# EAGLE board headstage-64-coax-adapter (EAGLE 9.5.1)
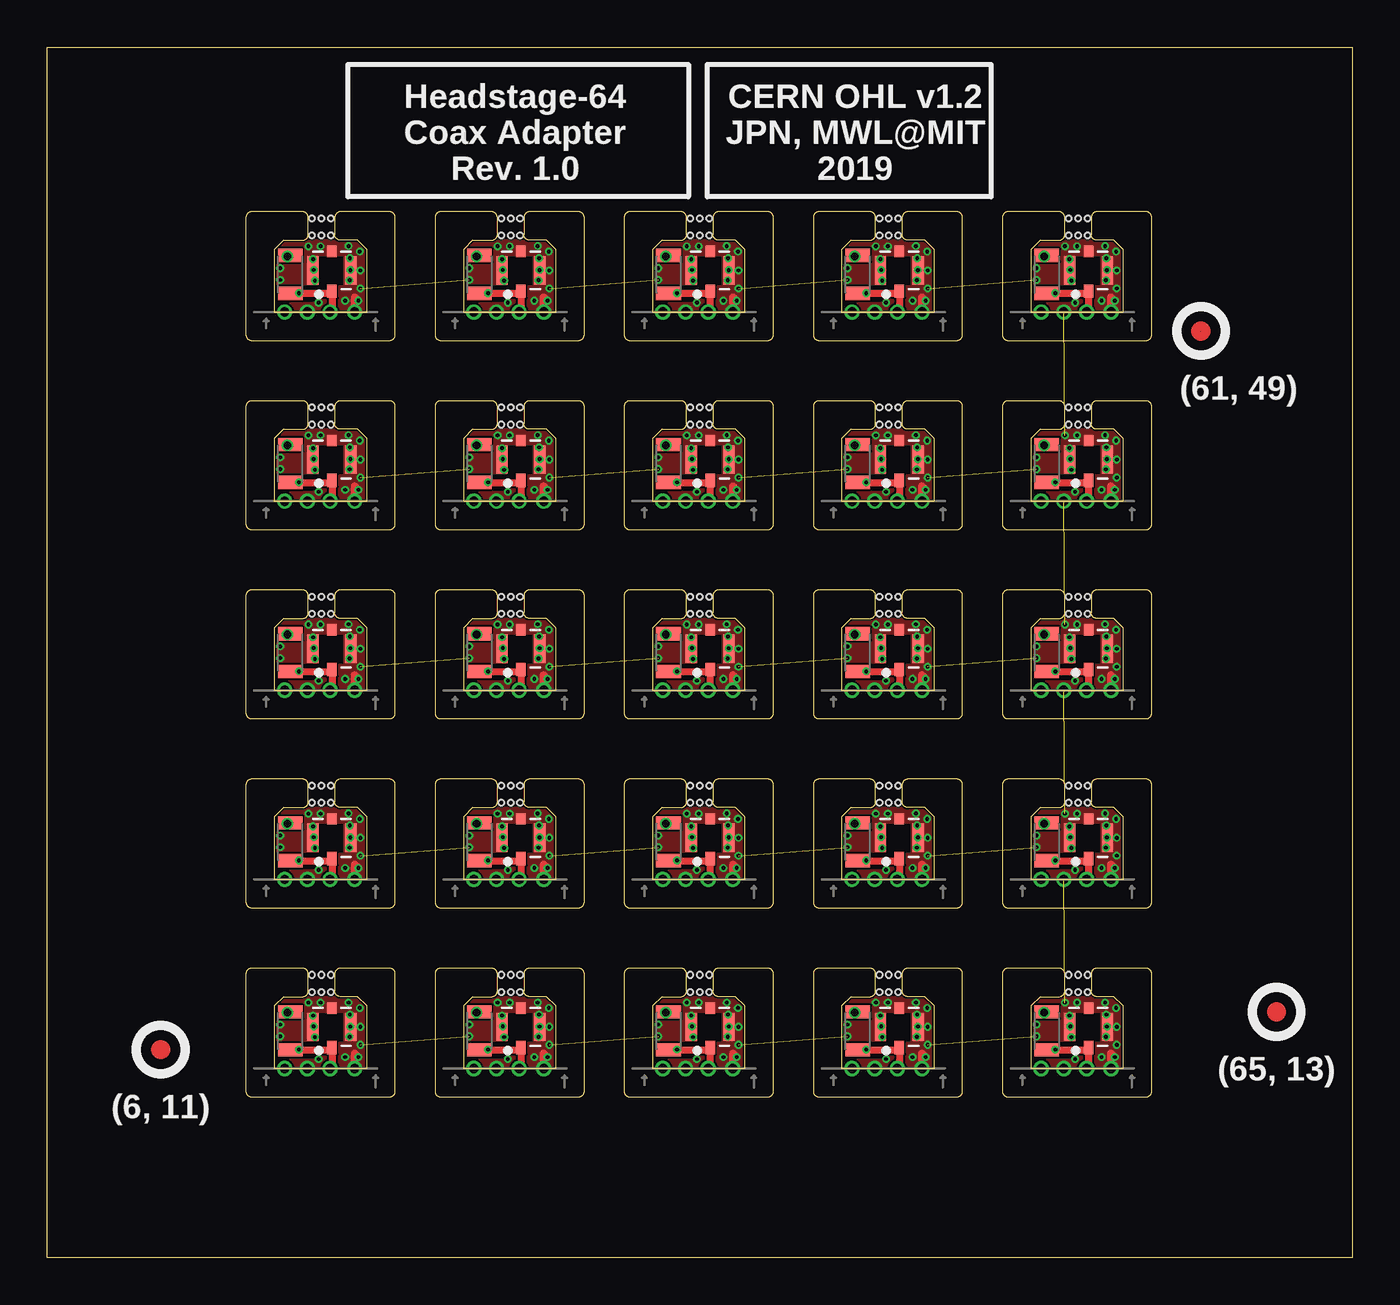
[diagram p0: board, top side]
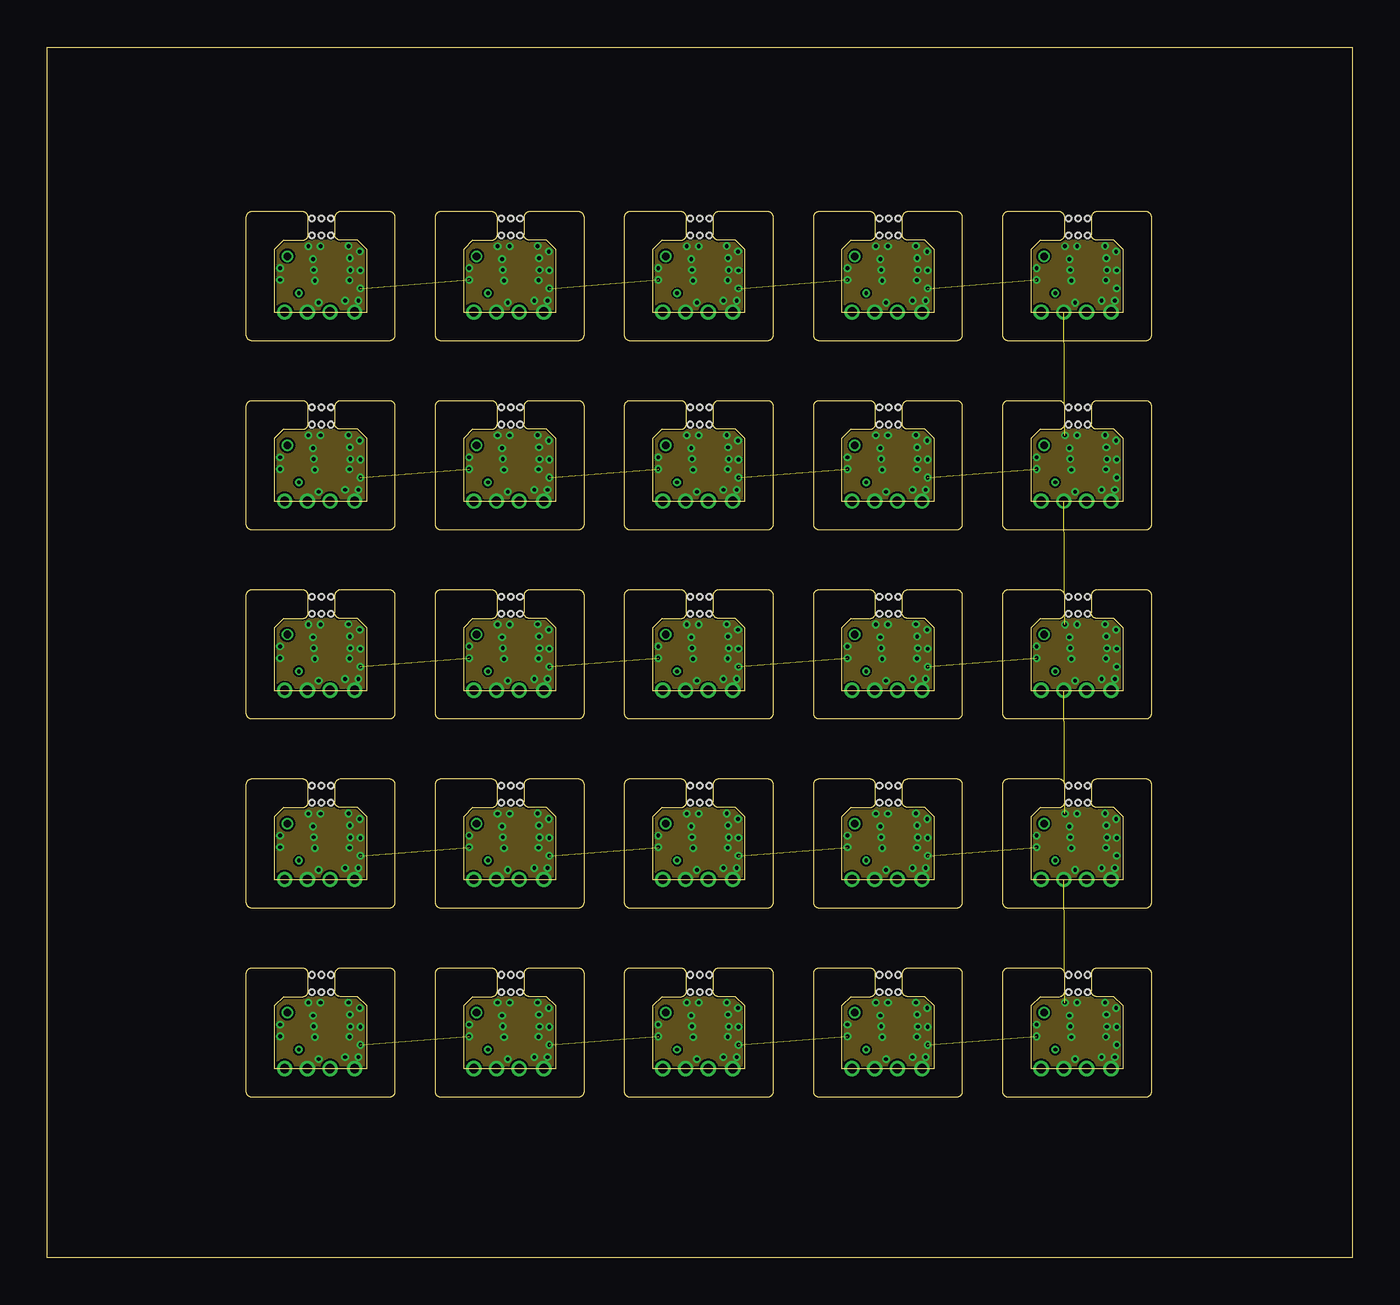
[diagram p1: board, inner layer Route2]
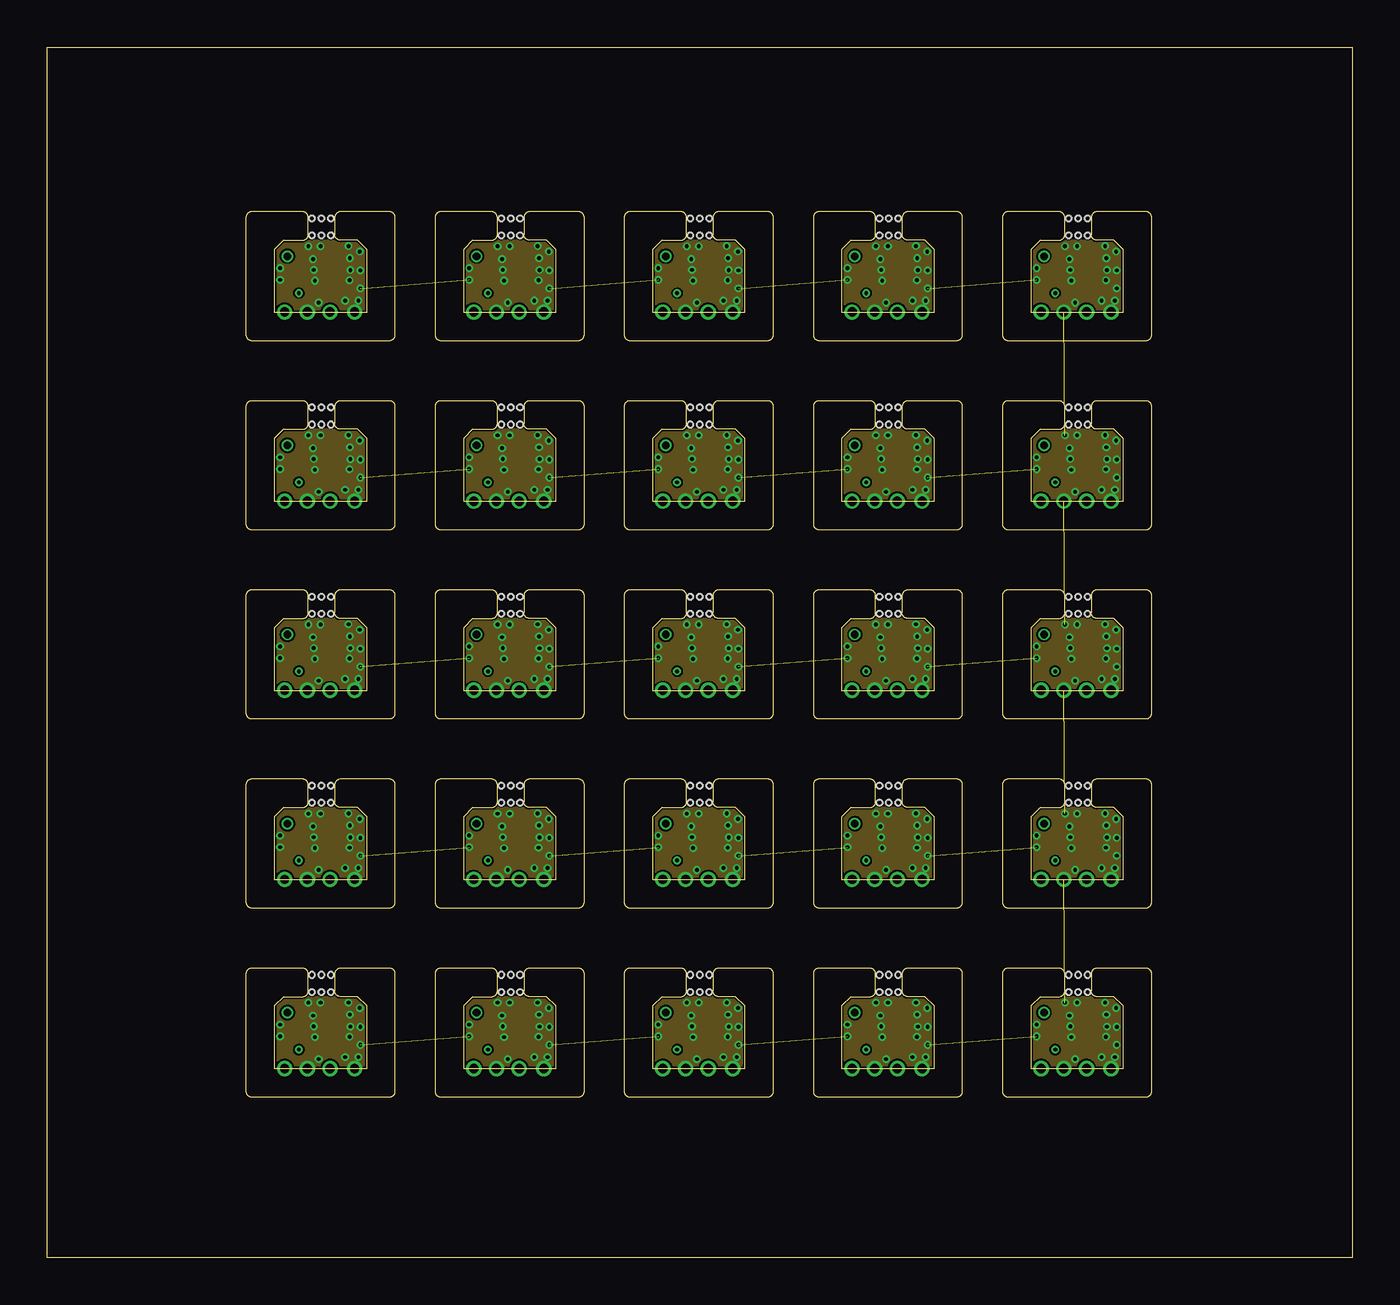
[diagram p2: board, inner layer Route15]
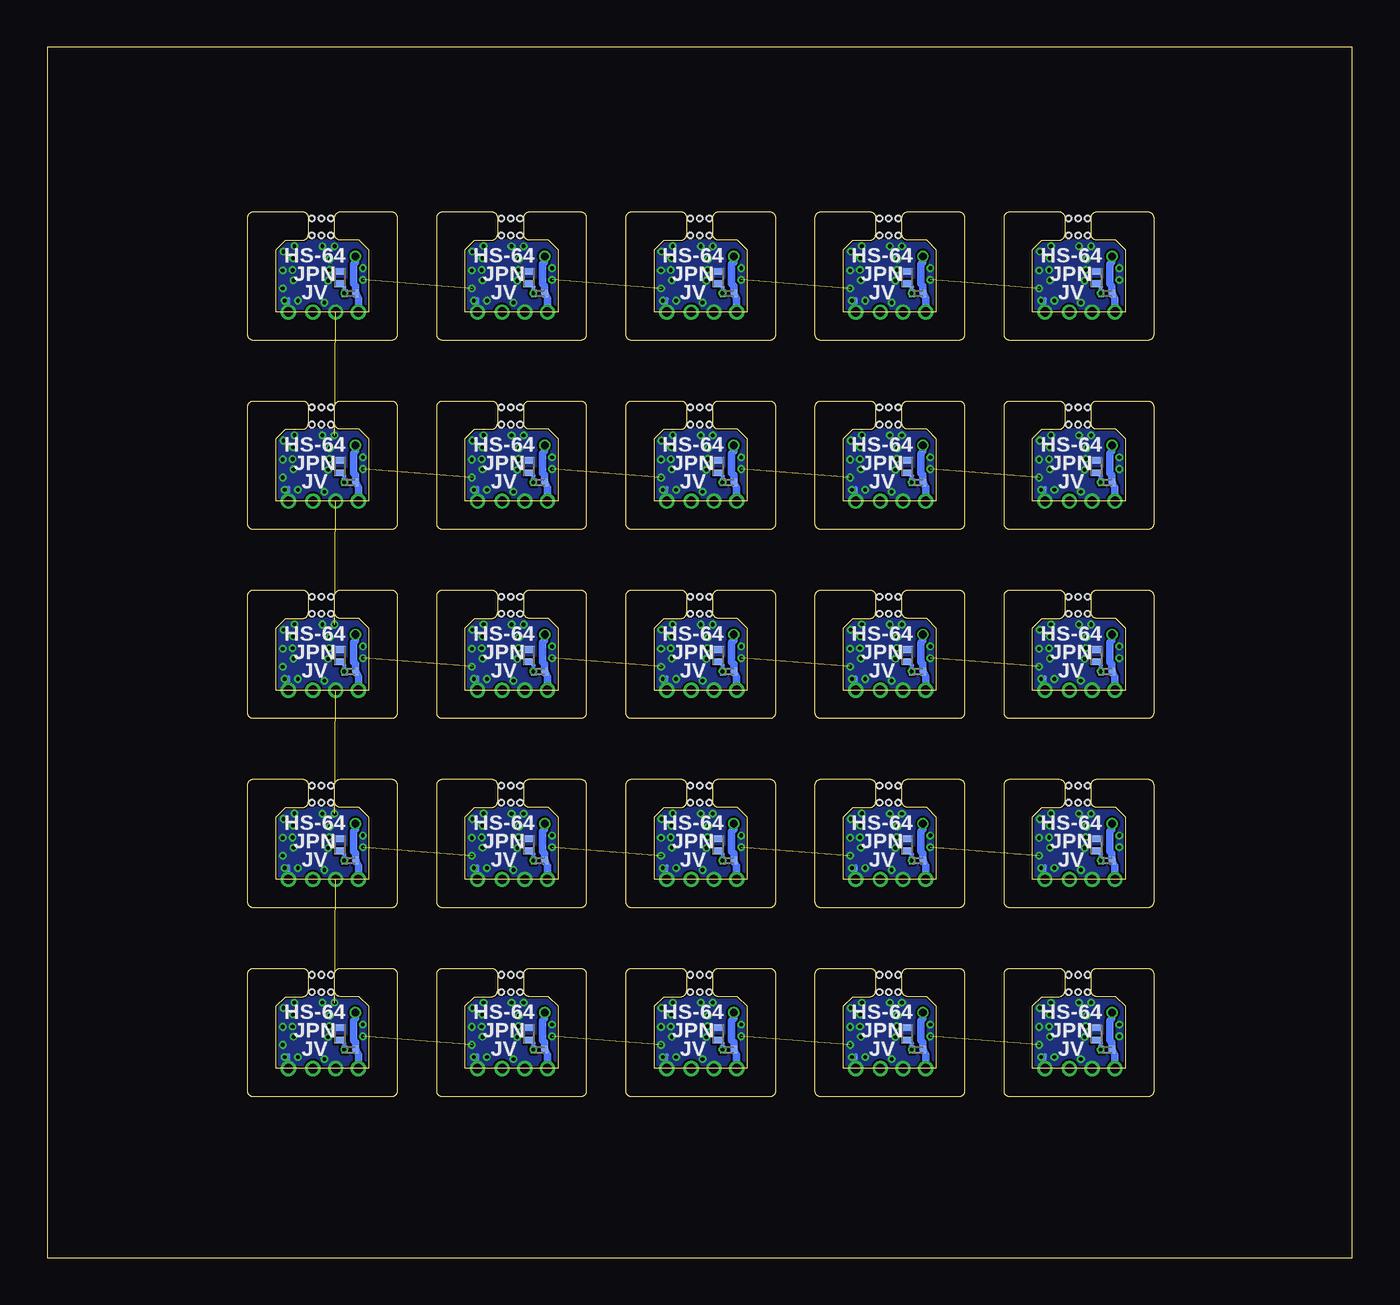
[diagram p3: board, bottom side, seen from below]

Size 69 x 64 mm. Coordinates in mm from the lower left corner, seen from the top.
Outline: 554 segments
Copper layers (1*2*15*16): Top 0.035mm / dielectric 0.2mm / Route2 0.0175mm / dielectric 0.3mm / Route15 0.0175mm / dielectric 0.2mm / Bottom 0.035mm
Design rules "seeed-studio-4-layer *": minimum track width 4mil, minimum drill 0.2mm, track to track 4mil, track to pad 4mil, pad to pad 4mil, via to via 4mil, smd to smd 0mil, copper to edge 0.1mm, drill to drill 10mil, minimum pad ring 6mil, minimum via ring 4mil, stop-mask expansion 4mil, vias tented up to drill 100mil, thermal gap 10mil
Holes 0.3 mm at 14.5,14.95 14.5,14.05 15,14.05 14,14.05 15,14.95 14,14.95 24.5,14.95 24.5,14.05 25,14.05 24,14.05 25,14.95 24,14.95 34.5,14.95 34.5,14.05 35,14.05 34,14.05 35,14.95 34,14.95 44.5,14.95 44.5,14.05 45,14.05 44,14.05 45,14.95 44,14.95 54.5,14.95 54.5,14.05 55,14.05 54,14.05 55,14.95 54,14.95 14.5,24.95 14.5,24.05 15,24.05 14,24.05 15,24.95 14,24.95 24.5,24.95 24.5,24.05 25,24.05 24,24.05 25,24.95 24,24.95 34.5,24.95 34.5,24.05 35,24.05 34,24.05 35,24.95 34,24.95 44.5,24.95 44.5,24.05 45,24.05 44,24.05 45,24.95 44,24.95 54.5,24.95 54.5,24.05 55,24.05 54,24.05 55,24.95 54,24.95 14.5,34.95 14.5,34.05 15,34.05 14,34.05 15,34.95 14,34.95 24.5,34.95 24.5,34.05 25,34.05 24,34.05 25,34.95 24,34.95 34.5,34.95 34.5,34.05 35,34.05 34,34.05 35,34.95 34,34.95 44.5,34.95 44.5,34.05 45,34.05 44,34.05 45,34.95 44,34.95 54.5,34.95 54.5,34.05 55,34.05 54,34.05 55,34.95 54,34.95 14.5,44.95 14.5,44.05 15,44.05 14,44.05 15,44.95 14,44.95 24.5,44.95 24.5,44.05 25,44.05 24,44.05 25,44.95 24,44.95 34.5,44.95 34.5,44.05 35,44.05 34,44.05 35,44.95 34,44.95 44.5,44.95 44.5,44.05 45,44.05 44,44.05 45,44.95 44,44.95 54.5,44.95 54.5,44.05 55,44.05 54,44.05 55,44.95 54,44.95 14.5,54.95 14.5,54.05 15,54.05 14,54.05 15,54.95 14,54.95 24.5,54.95 24.5,54.05 25,54.05 24,54.05 25,54.95 24,54.95 34.5,54.95 34.5,54.05 35,54.05 34,54.05 35,54.95 34,54.95 44.5,54.95 44.5,54.05 45,54.05 44,54.05 45,54.95 44,54.95 54.5,54.95 54.5,54.05 55,54.05 54,54.05 55,54.95 54,54.95

## Footprints (pad centres in the part's own frame; a part is rotated, then mirrored left to right if it is on the bottom)
0402T-DFN = smd 0.35 x 0.6: A -0.325,0; C 0.325,0
X_FL_R_SMT_1(02) = smd 0.5 x 0.7: P$1 0,-1.1 | smd 0.6 x 1.5: P$2 -1,0; P$4 1,0 | smd 0.5 x 0.6: P$3 0,1
HEADSTAGE64-DAUGHER-CARD-CASTELLATED = drill 0.5: 1 -2.4,0; 2 -1.2,0; 3 0,0; 4 1.3,0
0805T = smd 0.7 x 1.3: 1 -1,0; 2 1,0
0201T = smd 0.3 x 0.4: 1 -0.3,0; 2 0.3,0

## Placement (x,y rotation side)
D1  SESD0402X1UN-0020-090  [0402T-DFN]  13.53,11.83 270 bottom
D3  SESD0402X1UN-0020-090  [0402T-DFN]  23.53,11.83 270 bottom
D4  SESD0402X1UN-0020-090  [0402T-DFN]  13.53,21.83 270 bottom
D5  SESD0402X1UN-0020-090  [0402T-DFN]  33.53,11.83 270 bottom
D6  SESD0402X1UN-0020-090  [0402T-DFN]  33.53,21.83 270 bottom
D7  SESD0402X1UN-0020-090  [0402T-DFN]  43.53,11.83 270 bottom
D8  SESD0402X1UN-0020-090  [0402T-DFN]  23.53,21.83 270 bottom
D9  SESD0402X1UN-0020-090  [0402T-DFN]  53.53,11.83 270 bottom
D11  SESD0402X1UN-0020-090  [0402T-DFN]  43.53,21.83 270 bottom
D13  SESD0402X1UN-0020-090  [0402T-DFN]  53.53,21.83 270 bottom
D15  SESD0402X1UN-0020-090  [0402T-DFN]  13.53,31.83 270 bottom
D17  SESD0402X1UN-0020-090  [0402T-DFN]  23.53,31.83 270 bottom
D19  SESD0402X1UN-0020-090  [0402T-DFN]  33.53,31.83 270 bottom
D21  SESD0402X1UN-0020-090  [0402T-DFN]  43.53,31.83 270 bottom
D23  SESD0402X1UN-0020-090  [0402T-DFN]  53.53,31.83 270 bottom
D25  SESD0402X1UN-0020-090  [0402T-DFN]  13.53,41.83 270 bottom
D27  SESD0402X1UN-0020-090  [0402T-DFN]  23.53,41.83 270 bottom
D29  SESD0402X1UN-0020-090  [0402T-DFN]  33.53,41.83 270 bottom
D31  SESD0402X1UN-0020-090  [0402T-DFN]  43.53,41.83 270 bottom
D33  SESD0402X1UN-0020-090  [0402T-DFN]  53.53,41.83 270 bottom
D35  SESD0402X1UN-0020-090  [0402T-DFN]  13.53,51.83 270 bottom
D37  SESD0402X1UN-0020-090  [0402T-DFN]  23.53,51.83 270 bottom
D39  SESD0402X1UN-0020-090  [0402T-DFN]  33.53,51.83 270 bottom
D41  SESD0402X1UN-0020-090  [0402T-DFN]  43.53,51.83 270 bottom
D43  SESD0402X1UN-0020-090  [0402T-DFN]  53.53,51.83 270 bottom
E$1  [FIDUCIAL]  65,13 0 top
E$2  [FIDUCIAL]  61,49 0 top
E$4  [FIDUCIAL]  6,11 0 top
J1  X.FL-R-SMT-1(02)  [X_FL_R_SMT_1(02)]  15.05,12.2 0 top
J2  [HEADSTAGE64-DAUGHER-CARD-CASTELLATED]  14.95,10 0 top
J5  X.FL-R-SMT-1(02)  [X_FL_R_SMT_1(02)]  25.05,12.2 0 top
J6  [HEADSTAGE64-DAUGHER-CARD-CASTELLATED]  24.95,10 0 top
J7  X.FL-R-SMT-1(02)  [X_FL_R_SMT_1(02)]  15.05,22.2 0 top
J8  [HEADSTAGE64-DAUGHER-CARD-CASTELLATED]  14.95,20 0 top
J9  X.FL-R-SMT-1(02)  [X_FL_R_SMT_1(02)]  35.05,12.2 0 top
J10  [HEADSTAGE64-DAUGHER-CARD-CASTELLATED]  34.95,10 0 top
J11  X.FL-R-SMT-1(02)  [X_FL_R_SMT_1(02)]  35.05,22.2 0 top
J12  [HEADSTAGE64-DAUGHER-CARD-CASTELLATED]  34.95,20 0 top
J13  X.FL-R-SMT-1(02)  [X_FL_R_SMT_1(02)]  45.05,12.2 0 top
J14  [HEADSTAGE64-DAUGHER-CARD-CASTELLATED]  44.95,10 0 top
J15  X.FL-R-SMT-1(02)  [X_FL_R_SMT_1(02)]  25.05,22.2 0 top
J16  [HEADSTAGE64-DAUGHER-CARD-CASTELLATED]  24.95,20 0 top
J17  X.FL-R-SMT-1(02)  [X_FL_R_SMT_1(02)]  55.05,12.2 0 top
J18  [HEADSTAGE64-DAUGHER-CARD-CASTELLATED]  54.95,10 0 top
J21  X.FL-R-SMT-1(02)  [X_FL_R_SMT_1(02)]  45.05,22.2 0 top
J22  [HEADSTAGE64-DAUGHER-CARD-CASTELLATED]  44.95,20 0 top
J25  X.FL-R-SMT-1(02)  [X_FL_R_SMT_1(02)]  55.05,22.2 0 top
J26  [HEADSTAGE64-DAUGHER-CARD-CASTELLATED]  54.95,20 0 top
J29  X.FL-R-SMT-1(02)  [X_FL_R_SMT_1(02)]  15.05,32.2 0 top
J30  [HEADSTAGE64-DAUGHER-CARD-CASTELLATED]  14.95,30 0 top
J33  X.FL-R-SMT-1(02)  [X_FL_R_SMT_1(02)]  25.05,32.2 0 top
J34  [HEADSTAGE64-DAUGHER-CARD-CASTELLATED]  24.95,30 0 top
J37  X.FL-R-SMT-1(02)  [X_FL_R_SMT_1(02)]  35.05,32.2 0 top
J38  [HEADSTAGE64-DAUGHER-CARD-CASTELLATED]  34.95,30 0 top
J41  X.FL-R-SMT-1(02)  [X_FL_R_SMT_1(02)]  45.05,32.2 0 top
J42  [HEADSTAGE64-DAUGHER-CARD-CASTELLATED]  44.95,30 0 top
J45  X.FL-R-SMT-1(02)  [X_FL_R_SMT_1(02)]  55.05,32.2 0 top
J46  [HEADSTAGE64-DAUGHER-CARD-CASTELLATED]  54.95,30 0 top
J49  X.FL-R-SMT-1(02)  [X_FL_R_SMT_1(02)]  15.05,42.2 0 top
J50  [HEADSTAGE64-DAUGHER-CARD-CASTELLATED]  14.95,40 0 top
J53  X.FL-R-SMT-1(02)  [X_FL_R_SMT_1(02)]  25.05,42.2 0 top
J54  [HEADSTAGE64-DAUGHER-CARD-CASTELLATED]  24.95,40 0 top
J57  X.FL-R-SMT-1(02)  [X_FL_R_SMT_1(02)]  35.05,42.2 0 top
J58  [HEADSTAGE64-DAUGHER-CARD-CASTELLATED]  34.95,40 0 top
J61  X.FL-R-SMT-1(02)  [X_FL_R_SMT_1(02)]  45.05,42.2 0 top
J62  [HEADSTAGE64-DAUGHER-CARD-CASTELLATED]  44.95,40 0 top
J65  X.FL-R-SMT-1(02)  [X_FL_R_SMT_1(02)]  55.05,42.2 0 top
J66  [HEADSTAGE64-DAUGHER-CARD-CASTELLATED]  54.95,40 0 top
J69  X.FL-R-SMT-1(02)  [X_FL_R_SMT_1(02)]  15.05,52.2 0 top
J70  [HEADSTAGE64-DAUGHER-CARD-CASTELLATED]  14.95,50 0 top
J73  X.FL-R-SMT-1(02)  [X_FL_R_SMT_1(02)]  25.05,52.2 0 top
J74  [HEADSTAGE64-DAUGHER-CARD-CASTELLATED]  24.95,50 0 top
J77  X.FL-R-SMT-1(02)  [X_FL_R_SMT_1(02)]  35.05,52.2 0 top
J78  [HEADSTAGE64-DAUGHER-CARD-CASTELLATED]  34.95,50 0 top
J81  X.FL-R-SMT-1(02)  [X_FL_R_SMT_1(02)]  45.05,52.2 0 top
J82  [HEADSTAGE64-DAUGHER-CARD-CASTELLATED]  44.95,50 0 top
J85  X.FL-R-SMT-1(02)  [X_FL_R_SMT_1(02)]  55.05,52.2 0 top
J86  [HEADSTAGE64-DAUGHER-CARD-CASTELLATED]  54.95,50 0 top
L1  CIG21L4R7MNE  [0805T]  12.85,11.99 90 top
L3  CIG21L4R7MNE  [0805T]  22.85,11.99 90 top
L4  CIG21L4R7MNE  [0805T]  12.85,21.99 90 top
L5  CIG21L4R7MNE  [0805T]  32.85,11.99 90 top
L6  CIG21L4R7MNE  [0805T]  32.85,21.99 90 top
L7  CIG21L4R7MNE  [0805T]  42.85,11.99 90 top
L8  CIG21L4R7MNE  [0805T]  22.85,21.99 90 top
L9  CIG21L4R7MNE  [0805T]  52.85,11.99 90 top
L11  CIG21L4R7MNE  [0805T]  42.85,21.99 90 top
L13  CIG21L4R7MNE  [0805T]  52.85,21.99 90 top
L15  CIG21L4R7MNE  [0805T]  12.85,31.99 90 top
L17  CIG21L4R7MNE  [0805T]  22.85,31.99 90 top
L19  CIG21L4R7MNE  [0805T]  32.85,31.99 90 top
L21  CIG21L4R7MNE  [0805T]  42.85,31.99 90 top
L23  CIG21L4R7MNE  [0805T]  52.85,31.99 90 top
L25  CIG21L4R7MNE  [0805T]  12.85,41.99 90 top
L27  CIG21L4R7MNE  [0805T]  22.85,41.99 90 top
L29  CIG21L4R7MNE  [0805T]  32.85,41.99 90 top
L31  CIG21L4R7MNE  [0805T]  42.85,41.99 90 top
L33  CIG21L4R7MNE  [0805T]  52.85,41.99 90 top
L35  CIG21L4R7MNE  [0805T]  12.85,51.99 90 top
L37  CIG21L4R7MNE  [0805T]  22.85,51.99 90 top
L39  CIG21L4R7MNE  [0805T]  32.85,51.99 90 top
L41  CIG21L4R7MNE  [0805T]  42.85,51.99 90 top
L43  CIG21L4R7MNE  [0805T]  52.85,51.99 90 top
R2  1k  [0201T]  22.98,10.99 0 bottom
R3  1k  [0201T]  12.98,10.99 0 bottom
R4  1k  [0201T]  12.98,20.99 0 bottom
R5  1k  [0201T]  32.98,10.99 0 bottom
R6  1k  [0201T]  32.98,20.99 0 bottom
R7  1k  [0201T]  42.98,10.99 0 bottom
R8  1k  [0201T]  22.98,20.99 0 bottom
R9  1k  [0201T]  52.98,10.99 0 bottom
R11  1k  [0201T]  42.98,20.99 0 bottom
R13  1k  [0201T]  52.98,20.99 0 bottom
R15  1k  [0201T]  12.98,30.99 0 bottom
R17  1k  [0201T]  22.98,30.99 0 bottom
R19  1k  [0201T]  32.98,30.99 0 bottom
R21  1k  [0201T]  42.98,30.99 0 bottom
R23  1k  [0201T]  52.98,30.99 0 bottom
R25  1k  [0201T]  12.98,40.99 0 bottom
R27  1k  [0201T]  22.98,40.99 0 bottom
R29  1k  [0201T]  32.98,40.99 0 bottom
R31  1k  [0201T]  42.98,40.99 0 bottom
R33  1k  [0201T]  52.98,40.99 0 bottom
R35  1k  [0201T]  12.98,50.99 0 bottom
R37  1k  [0201T]  22.98,50.99 0 bottom
R39  1k  [0201T]  32.98,50.99 0 bottom
R41  1k  [0201T]  42.98,50.99 0 bottom
R43  1k  [0201T]  52.98,50.99 0 bottom

## Library data of the parts
D1 D3-D9 D11 D13 D15 D17 D19 D21 D23 D25 D27 D29 D31 D33 D35 D37 D39 D41 D43 J1 J2 J5-J18 J21 J22 J25 J26 J29 J30 J33 J34 J37 J38 J41 J42 J45 J46 J49 J50 J53 J54 J57 J58 J61 J62 J65 J66 J69 J70 J73 J74 J77 J78 J81 J82 J85 J86 L1 L3-L9 L11 L13 L15 L17 L19 L21 L23 L25 L27 L29 L31 L33 L35 L37 L39 L41 L43 R2-R9 R11 R13 R15 R17 R19 R21 R23 R25 R27 R29 R31 R33 R35 R37 R39 R41 R43 = jonnew
E$1 E$2 E$4 = fiducial

## Nets
_SIGOUT1: D1.C J1.P$1 J2.3 L1.1 R3.1
_SIGOUT3: D3.C J5.P$1 J6.3 L3.1 R2.1
_SIGOUT4: D4.C J7.P$1 J8.3 L4.1 R4.1
_SIGOUT5: D5.C J9.P$1 J10.3 L5.1 R5.1
_SIGOUT6: D6.C J11.P$1 J12.3 L6.1 R6.1
_SIGOUT7: D7.C J13.P$1 J14.3 L7.1 R7.1
_SIGOUT8: D8.C J15.P$1 J16.3 L8.1 R8.1
_SIGOUT9: D9.C J17.P$1 J18.3 L9.1 R9.1
_SIGOUT11: D11.C J21.P$1 J22.3 L11.1 R11.1
_SIGOUT13: D13.C J25.P$1 J26.3 L13.1 R13.1
_SIGOUT15: D15.C J29.P$1 J30.3 L15.1 R15.1
_SIGOUT17: D17.C J33.P$1 J34.3 L17.1 R17.1
_SIGOUT19: D19.C J37.P$1 J38.3 L19.1 R19.1
_SIGOUT21: D21.C J41.P$1 J42.3 L21.1 R21.1
_SIGOUT23: D23.C J45.P$1 J46.3 L23.1 R23.1
_SIGOUT25: D25.C J49.P$1 J50.3 L25.1 R25.1
_SIGOUT27: D27.C J53.P$1 J54.3 L27.1 R27.1
_SIGOUT29: D29.C J57.P$1 J58.3 L29.1 R29.1
_SIGOUT31: D31.C J61.P$1 J62.3 L31.1 R31.1
_SIGOUT33: D33.C J65.P$1 J66.3 L33.1 R33.1
_SIGOUT35: D35.C J69.P$1 J70.3 L35.1 R35.1
_SIGOUT37: D37.C J73.P$1 J74.3 L37.1 R37.1
_SIGOUT39: D39.C J77.P$1 J78.3 L39.1 R39.1
_SIGOUT41: D41.C J81.P$1 J82.3 L41.1 R41.1
_SIGOUT43: D43.C J85.P$1 J86.3 L43.1 R43.1
GND: D1.A D3.A D4.A D5.A D6.A D7.A D8.A D9.A D11.A D13.A D15.A D17.A D19.A D21.A D23.A D25.A D27.A D29.A D31.A D33.A D35.A D37.A D39.A D41.A D43.A J1.P$2 J1.P$3 J1.P$4 J2.2 J2.4 J5.P$2 J5.P$3 J5.P$4 J6.2 J6.4 J7.P$2 J7.P$3 J7.P$4 J8.2 J8.4 J9.P$2 J9.P$3 J9.P$4 J10.2 J10.4 J11.P$2 J11.P$3 J11.P$4 J12.2 J12.4 J13.P$2 J13.P$3 J13.P$4 J14.2 J14.4 J15.P$2 J15.P$3 J15.P$4 J16.2 J16.4 J17.P$2 J17.P$3 J17.P$4 J18.2 J18.4 J21.P$2 J21.P$3 J21.P$4 J22.2 J22.4 J25.P$2 J25.P$3 J25.P$4 J26.2 J26.4 J29.P$2 J29.P$3 J29.P$4 J30.2 J30.4 J33.P$2 J33.P$3 J33.P$4 J34.2 J34.4 J37.P$2 J37.P$3 J37.P$4 J38.2 J38.4 J41.P$2 J41.P$3 J41.P$4 J42.2 J42.4 J45.P$2 J45.P$3 J45.P$4 J46.2 J46.4 J49.P$2 J49.P$3 J49.P$4 J50.2 J50.4 J53.P$2 J53.P$3 J53.P$4 J54.2 J54.4 J57.P$2 J57.P$3 J57.P$4 J58.2 J58.4 J61.P$2 J61.P$3 J61.P$4 J62.2 J62.4 J65.P$2 J65.P$3 J65.P$4 J66.2 J66.4 J69.P$2 J69.P$3 J69.P$4 J70.2 J70.4 J73.P$2 J73.P$3 J73.P$4 J74.2 J74.4 J77.P$2 J77.P$3 J77.P$4 J78.2 J78.4 J81.P$2 J81.P$3 J81.P$4 J82.2 J82.4 J85.P$2 J85.P$3 J85.P$4 J86.2 J86.4
N$3: J6.1 L3.2 R2.2
N$5: J8.1 L4.2 R4.2
N$7: J10.1 L5.2 R5.2
N$9: J12.1 L6.2 R6.2
N$11: J14.1 L7.2 R7.2
N$13: J16.1 L8.2 R8.2
N$15: J18.1 L9.2 R9.2
N$19: J22.1 L11.2 R11.2
N$23: J26.1 L13.2 R13.2
N$27: J30.1 L15.2 R15.2
N$31: J34.1 L17.2 R17.2
N$35: J38.1 L19.2 R19.2
N$39: J42.1 L21.2 R21.2
N$43: J46.1 L23.2 R23.2
N$47: J50.1 L25.2 R25.2
N$48: J2.1 L1.2 R3.2
N$53: J54.1 L27.2 R27.2
N$57: J58.1 L29.2 R29.2
N$61: J62.1 L31.2 R31.2
N$65: J66.1 L33.2 R33.2
N$69: J70.1 L35.2 R35.2
N$73: J74.1 L37.2 R37.2
N$77: J78.1 L39.2 R39.2
N$81: J82.1 L41.2 R41.2
N$85: J86.1 L43.2 R43.2

## Tracks (layer width: path | path; a pad name or v marks a point on that pad's centre or on a via)
_SIGOUT1  (via drill 0.2)
  Top 0.2: v13.3,11 13.2,10.99
  Top 0.37: 13.2,10.99 14.94,10.99 | J1.P$1 15.05,10.1 arc-90 J2.3
  Top 0.4: 14.95,11 J1.P$1 14.94,10.99 | L1.1 v13.3,11
  Bottom 0.127: R3.1 R3.1 arc90 v13.3,11
  Bottom 0.2: R3.1 13.28,11.34 D1.C
_SIGOUT3  (via drill 0.2)
  Top 0.2: v23.3,11 23.2,10.99
  Top 0.37: 23.2,10.99 24.94,10.99 | J5.P$1 25.05,10.1 arc-90 J6.3
  Top 0.4: 24.95,11 J5.P$1 24.94,10.99 | L3.1 v23.3,11
  Bottom 0.127: R2.1 R2.1 arc90 v23.3,11
  Bottom 0.2: R2.1 23.28,11.34 D3.C
_SIGOUT4  (via drill 0.2)
  Top 0.2: v13.3,21 13.2,20.99
  Top 0.37: 13.2,20.99 14.94,20.99 | J7.P$1 15.05,20.1 arc-90 J8.3
  Top 0.4: 14.95,21 J7.P$1 14.94,20.99 | L4.1 v13.3,21
  Bottom 0.127: R4.1 R4.1 arc90 v13.3,21
  Bottom 0.2: R4.1 13.28,21.34 D4.C
_SIGOUT5  (via drill 0.2)
  Top 0.2: v33.3,11 33.2,10.99
  Top 0.37: 33.2,10.99 34.94,10.99 | J9.P$1 35.05,10.1 arc-90 J10.3
  Top 0.4: 34.95,11 J9.P$1 34.94,10.99 | L5.1 v33.3,11
  Bottom 0.127: R5.1 R5.1 arc90 v33.3,11
  Bottom 0.2: R5.1 33.28,11.34 D5.C
_SIGOUT6  (via drill 0.2)
  Top 0.2: v33.3,21 33.2,20.99
  Top 0.37: 33.2,20.99 34.94,20.99 | J11.P$1 35.05,20.1 arc-90 J12.3
  Top 0.4: 34.95,21 J11.P$1 34.94,20.99 | L6.1 v33.3,21
  Bottom 0.127: R6.1 R6.1 arc90 v33.3,21
  Bottom 0.2: R6.1 33.28,21.34 D6.C
_SIGOUT7  (via drill 0.2)
  Top 0.2: v43.3,11 43.2,10.99
  Top 0.37: 43.2,10.99 44.94,10.99 | J13.P$1 45.05,10.1 arc-90 J14.3
  Top 0.4: 44.95,11 J13.P$1 44.94,10.99 | L7.1 v43.3,11
  Bottom 0.127: R7.1 R7.1 arc90 v43.3,11
  Bottom 0.2: R7.1 43.28,11.34 D7.C
_SIGOUT8  (via drill 0.2)
  Top 0.2: v23.3,21 23.2,20.99
  Top 0.37: 23.2,20.99 24.94,20.99 | J15.P$1 25.05,20.1 arc-90 J16.3
  Top 0.4: 24.95,21 J15.P$1 24.94,20.99 | L8.1 v23.3,21
  Bottom 0.127: R8.1 R8.1 arc90 v23.3,21
  Bottom 0.2: R8.1 23.28,21.34 D8.C
_SIGOUT9  (via drill 0.2)
  Top 0.2: v53.3,11 53.2,10.99
  Top 0.37: 53.2,10.99 54.94,10.99 | J17.P$1 55.05,10.1 arc-90 J18.3
  Top 0.4: 54.95,11 J17.P$1 54.94,10.99 | L9.1 v53.3,11
  Bottom 0.127: R9.1 R9.1 arc90 v53.3,11
  Bottom 0.2: R9.1 53.28,11.34 D9.C
_SIGOUT11  (via drill 0.2)
  Top 0.2: v43.3,21 43.2,20.99
  Top 0.37: 43.2,20.99 44.94,20.99 | J21.P$1 45.05,20.1 arc-90 J22.3
  Top 0.4: 44.95,21 J21.P$1 44.94,20.99 | L11.1 v43.3,21
  Bottom 0.127: R11.1 R11.1 arc90 v43.3,21
  Bottom 0.2: R11.1 43.28,21.34 D11.C
_SIGOUT13  (via drill 0.2)
  Top 0.2: v53.3,21 53.2,20.99
  Top 0.37: 53.2,20.99 54.94,20.99 | J25.P$1 55.05,20.1 arc-90 J26.3
  Top 0.4: 54.95,21 J25.P$1 54.94,20.99 | L13.1 v53.3,21
  Bottom 0.127: R13.1 R13.1 arc90 v53.3,21
  Bottom 0.2: R13.1 53.28,21.34 D13.C
_SIGOUT15  (via drill 0.2)
  Top 0.2: v13.3,31 13.2,30.99
  Top 0.37: 13.2,30.99 14.94,30.99 | J29.P$1 15.05,30.1 arc-90 J30.3
  Top 0.4: 14.95,31 J29.P$1 14.94,30.99 | L15.1 v13.3,31
  Bottom 0.127: R15.1 R15.1 arc90 v13.3,31
  Bottom 0.2: R15.1 13.28,31.34 D15.C
_SIGOUT17  (via drill 0.2)
  Top 0.2: v23.3,31 23.2,30.99
  Top 0.37: 23.2,30.99 24.94,30.99 | J33.P$1 25.05,30.1 arc-90 J34.3
  Top 0.4: 24.95,31 J33.P$1 24.94,30.99 | L17.1 v23.3,31
  Bottom 0.127: R17.1 R17.1 arc90 v23.3,31
  Bottom 0.2: R17.1 23.28,31.34 D17.C
_SIGOUT19  (via drill 0.2)
  Top 0.2: v33.3,31 33.2,30.99
  Top 0.37: 33.2,30.99 34.94,30.99 | J37.P$1 35.05,30.1 arc-90 J38.3
  Top 0.4: 34.95,31 J37.P$1 34.94,30.99 | L19.1 v33.3,31
  Bottom 0.127: R19.1 R19.1 arc90 v33.3,31
  Bottom 0.2: R19.1 33.28,31.34 D19.C
_SIGOUT21  (via drill 0.2)
  Top 0.2: v43.3,31 43.2,30.99
  Top 0.37: 43.2,30.99 44.94,30.99 | J41.P$1 45.05,30.1 arc-90 J42.3
  Top 0.4: 44.95,31 J41.P$1 44.94,30.99 | L21.1 v43.3,31
  Bottom 0.127: R21.1 R21.1 arc90 v43.3,31
  Bottom 0.2: R21.1 43.28,31.34 D21.C
_SIGOUT23  (via drill 0.2)
  Top 0.2: v53.3,31 53.2,30.99
  Top 0.37: 53.2,30.99 54.94,30.99 | J45.P$1 55.05,30.1 arc-90 J46.3
  Top 0.4: 54.95,31 J45.P$1 54.94,30.99 | L23.1 v53.3,31
  Bottom 0.127: R23.1 R23.1 arc90 v53.3,31
  Bottom 0.2: R23.1 53.28,31.34 D23.C
_SIGOUT25  (via drill 0.2)
  Top 0.2: v13.3,41 13.2,40.99
  Top 0.37: 13.2,40.99 14.94,40.99 | J49.P$1 15.05,40.1 arc-90 J50.3
  Top 0.4: 14.95,41 J49.P$1 14.94,40.99 | L25.1 v13.3,41
  Bottom 0.127: R25.1 R25.1 arc90 v13.3,41
  Bottom 0.2: R25.1 13.28,41.34 D25.C
_SIGOUT27  (via drill 0.2)
  Top 0.2: v23.3,41 23.2,40.99
  Top 0.37: 23.2,40.99 24.94,40.99 | J53.P$1 25.05,40.1 arc-90 J54.3
  Top 0.4: 24.95,41 J53.P$1 24.94,40.99 | L27.1 v23.3,41
  Bottom 0.127: R27.1 R27.1 arc90 v23.3,41
  Bottom 0.2: R27.1 23.28,41.34 D27.C
_SIGOUT29  (via drill 0.2)
  Top 0.2: v33.3,41 33.2,40.99
  Top 0.37: 33.2,40.99 34.94,40.99 | J57.P$1 35.05,40.1 arc-90 J58.3
  Top 0.4: 34.95,41 J57.P$1 34.94,40.99 | L29.1 v33.3,41
  Bottom 0.127: R29.1 R29.1 arc90 v33.3,41
  Bottom 0.2: R29.1 33.28,41.34 D29.C
_SIGOUT31  (via drill 0.2)
  Top 0.2: v43.3,41 43.2,40.99
  Top 0.37: 43.2,40.99 44.94,40.99 | J61.P$1 45.05,40.1 arc-90 J62.3
  Top 0.4: 44.95,41 J61.P$1 44.94,40.99 | L31.1 v43.3,41
  Bottom 0.127: R31.1 R31.1 arc90 v43.3,41
  Bottom 0.2: R31.1 43.28,41.34 D31.C
_SIGOUT33  (via drill 0.2)
  Top 0.2: v53.3,41 53.2,40.99
  Top 0.37: 53.2,40.99 54.94,40.99 | J65.P$1 55.05,40.1 arc-90 J66.3
  Top 0.4: 54.95,41 J65.P$1 54.94,40.99 | L33.1 v53.3,41
  Bottom 0.127: R33.1 R33.1 arc90 v53.3,41
  Bottom 0.2: R33.1 53.28,41.34 D33.C
_SIGOUT35  (via drill 0.2)
  Top 0.2: v13.3,51 13.2,50.99
  Top 0.37: 13.2,50.99 14.94,50.99 | J69.P$1 15.05,50.1 arc-90 J70.3
  Top 0.4: 14.95,51 J69.P$1 14.94,50.99 | L35.1 v13.3,51
  Bottom 0.127: R35.1 R35.1 arc90 v13.3,51
  Bottom 0.2: R35.1 13.28,51.34 D35.C
_SIGOUT37  (via drill 0.2)
  Top 0.2: v23.3,51 23.2,50.99
  Top 0.37: 23.2,50.99 24.94,50.99 | J73.P$1 25.05,50.1 arc-90 J74.3
  Top 0.4: 24.95,51 J73.P$1 24.94,50.99 | L37.1 v23.3,51
  Bottom 0.127: R37.1 R37.1 arc90 v23.3,51
  Bottom 0.2: R37.1 23.28,51.34 D37.C
_SIGOUT39  (via drill 0.2)
  Top 0.2: v33.3,51 33.2,50.99
  Top 0.37: 33.2,50.99 34.94,50.99 | J77.P$1 35.05,50.1 arc-90 J78.3
  Top 0.4: 34.95,51 J77.P$1 34.94,50.99 | L39.1 v33.3,51
  Bottom 0.127: R39.1 R39.1 arc90 v33.3,51
  Bottom 0.2: R39.1 33.28,51.34 D39.C
_SIGOUT41  (via drill 0.2)
  Top 0.2: v43.3,51 43.2,50.99
  Top 0.37: 43.2,50.99 44.94,50.99 | J81.P$1 45.05,50.1 arc-90 J82.3
  Top 0.4: 44.95,51 J81.P$1 44.94,50.99 | L41.1 v43.3,51
  Bottom 0.127: R41.1 R41.1 arc90 v43.3,51
  Bottom 0.2: R41.1 43.28,51.34 D41.C
_SIGOUT43  (via drill 0.2)
  Top 0.2: v53.3,51 53.2,50.99
  Top 0.37: 53.2,50.99 54.94,50.99 | J85.P$1 55.05,50.1 arc-90 J86.3
  Top 0.4: 54.95,51 J85.P$1 54.94,50.99 | L43.1 v53.3,51
  Bottom 0.127: R43.1 R43.1 arc90 v53.3,51
  Bottom 0.2: R43.1 53.28,51.34 D43.C
GND  (via drill 0.2)  (24 unrouted)
  Top 0.4: J2.2 13.9,10.15 | J2.4 16.25,10.8 v16.45,10.6 | J6.2 23.9,10.15 | J6.4 26.25,10.8 v26.45,10.6 | J10.2 33.9,10.15 | J10.4 36.25,10.8 v36.45,10.6 | J14.2 43.9,10.15 | J14.4 46.25,10.8 v46.45,10.6 | J18.2 53.9,10.15 | J18.4 56.25,10.8 v56.45,10.6 | J8.2 13.9,20.15 | J8.4 16.25,20.8 v16.45,20.6 | J16.2 23.9,20.15 | J16.4 26.25,20.8 v26.45,20.6 | J12.2 33.9,20.15 | J12.4 36.25,20.8 v36.45,20.6 | J22.2 43.9,20.15 | J22.4 46.25,20.8 v46.45,20.6 | J26.2 53.9,20.15 | J26.4 56.25,20.8 v56.45,20.6 | J30.2 13.9,30.15 | J30.4 16.25,30.8 v16.45,30.6 | J34.2 23.9,30.15 | J34.4 26.25,30.8 v26.45,30.6 | J38.2 33.9,30.15 | J38.4 36.25,30.8 v36.45,30.6 | J42.2 43.9,30.15 | J42.4 46.25,30.8 v46.45,30.6 | J46.2 53.9,30.15 | J46.4 56.25,30.8 v56.45,30.6 | J50.2 13.9,40.15 | J50.4 16.25,40.8 v16.45,40.6 | J54.2 23.9,40.15 | J54.4 26.25,40.8 v26.45,40.6 | J58.2 33.9,40.15 | J58.4 36.25,40.8 v36.45,40.6 | J62.2 43.9,40.15 | J62.4 46.25,40.8 v46.45,40.6 | J66.2 53.9,40.15 | J66.4 56.25,40.8 v56.45,40.6 | J70.2 13.9,50.15 | J70.4 16.25,50.8 v16.45,50.6 | J74.2 23.9,50.15 | J74.4 26.25,50.8 v26.45,50.6 | J78.2 33.9,50.15 | J78.4 36.25,50.8 v36.45,50.6 | J82.2 43.9,50.15 | J82.4 46.25,50.8 v46.45,50.6 | J86.2 53.9,50.15 | J86.4 56.25,50.8 v56.45,50.6
  Bottom 0.2: J2.4 16.25,10.7 | J6.4 26.25,10.7 | J10.4 36.25,10.7 | J14.4 46.25,10.7 | J18.4 56.25,10.7 | J8.4 16.25,20.7 | J16.4 26.25,20.7 | J12.4 36.25,20.7 | J22.4 46.25,20.7 | J26.4 56.25,20.7 | J30.4 16.25,30.7 | J34.4 26.25,30.7 | J38.4 36.25,30.7 | J42.4 46.25,30.7 | J46.4 56.25,30.7 | J50.4 16.25,40.7 | J54.4 26.25,40.7 | J58.4 36.25,40.7 | J62.4 46.25,40.7 | J66.4 56.25,40.7 | J70.4 16.25,50.7 | J74.4 26.25,50.7 | J78.4 36.25,50.7 | J82.4 46.25,50.7 | J86.4 56.25,50.7
  other vias: 14.09,12.23 14.35,10.5 12.31,12.32 12.31,11.7 14.15,11.66 16.55,12.2 16.03,12.22 15.98,11.68 14.45,13.48 13.81,13.48 14.05,12.8 16.55,11.25 15.75,10.6 16,12.85 15.93,13.49 16.52,13.2 24.09,12.23 24.35,10.5 22.31,12.32 22.31,11.7 24.15,11.66 26.55,12.2 26.03,12.22 25.98,11.68 24.45,13.48 23.81,13.48 24.05,12.8 26.55,11.25 25.75,10.6 26,12.85 25.93,13.49 26.52,13.2 34.09,12.23 34.35,10.5 32.31,12.32 32.31,11.7 34.15,11.66 36.55,12.2 36.03,12.22 35.98,11.68 34.45,13.48 33.81,13.48 34.05,12.8 36.55,11.25 35.75,10.6 36,12.85 35.93,13.49 36.52,13.2 44.09,12.23 44.35,10.5 42.31,12.32 42.31,11.7 44.15,11.66 46.55,12.2 46.03,12.22 45.98,11.68 44.45,13.48 43.81,13.48 44.05,12.8 46.55,11.25 45.75,10.6 46,12.85 45.93,13.49 46.52,13.2 54.09,12.23 54.35,10.5 52.31,12.32 52.31,11.7 54.15,11.66 56.55,12.2 56.03,12.22 55.98,11.68 54.45,13.48 53.81,13.48 54.05,12.8 56.55,11.25 55.75,10.6 56,12.85 55.93,13.49 56.52,13.2 14.09,22.23 14.35,20.5 12.31,22.32 12.31,21.7 14.15,21.66 16.55,22.2 16.03,22.22 15.98,21.68 14.45,23.48 13.81,23.48 14.05,22.8 16.55,21.25 15.75,20.6 16,22.85 15.93,23.49 16.52,23.2 24.09,22.23 24.35,20.5 22.31,22.32 22.31,21.7 24.15,21.66 26.55,22.2 26.03,22.22 25.98,21.68 24.45,23.48 23.81,23.48 24.05,22.8 26.55,21.25 25.75,20.6 26,22.85 25.93,23.49 26.52,23.2 34.09,22.23 34.35,20.5 32.31,22.32 32.31,21.7 34.15,21.66 36.55,22.2 36.03,22.22 35.98,21.68 34.45,23.48 33.81,23.48 34.05,22.8 36.55,21.25 35.75,20.6 36,22.85 35.93,23.49 36.52,23.2 44.09,22.23 44.35,20.5 42.31,22.32 42.31,21.7 44.15,21.66 46.55,22.2 46.03,22.22 45.98,21.68 44.45,23.48 43.81,23.48 44.05,22.8 46.55,21.25 45.75,20.6 46,22.85 45.93,23.49 46.52,23.2 54.09,22.23 54.35,20.5 52.31,22.32 52.31,21.7 54.15,21.66 56.55,22.2 56.03,22.22 55.98,21.68 54.45,23.48 53.81,23.48 54.05,22.8 56.55,21.25 55.75,20.6 56,22.85 55.93,23.49 56.52,23.2 14.09,32.23 14.35,30.5 12.31,32.32 12.31,31.7 14.15,31.66 16.55,32.2 16.03,32.22 15.98,31.68 14.45,33.48 13.81,33.48 14.05,32.8 16.55,31.25 15.75,30.6 16,32.85 15.93,33.49 16.52,33.2 24.09,32.23 24.35,30.5 22.31,32.32 22.31,31.7 24.15,31.66 26.55,32.2 26.03,32.22 25.98,31.68 24.45,33.48 23.81,33.48 24.05,32.8 26.55,31.25 25.75,30.6 26,32.85 25.93,33.49 26.52,33.2 34.09,32.23 34.35,30.5 32.31,32.32 32.31,31.7 34.15,31.66 36.55,32.2 36.03,32.22 35.98,31.68 34.45,33.48 33.81,33.48 34.05,32.8 36.55,31.25 35.75,30.6 36,32.85 35.93,33.49 36.52,33.2 44.09,32.23 44.35,30.5 42.31,32.32 42.31,31.7 44.15,31.66 46.55,32.2 46.03,32.22 45.98,31.68 44.45,33.48 43.81,33.48 44.05,32.8 46.55,31.25 45.75,30.6 46,32.85 45.93,33.49 46.52,33.2 54.09,32.23 54.35,30.5 52.31,32.32 52.31,31.7 54.15,31.66 56.55,32.2 56.03,32.22 55.98,31.68 54.45,33.48 53.81,33.48 54.05,32.8 56.55,31.25 55.75,30.6 56,32.85 55.93,33.49 56.52,33.2 14.09,42.23 14.35,40.5 12.31,42.32 12.31,41.7 14.15,41.66 16.55,42.2 16.03,42.22 15.98,41.68 14.45,43.48 13.81,43.48 14.05,42.8 16.55,41.25 15.75,40.6 16,42.85 15.93,43.49 16.52,43.2 24.09,42.23 24.35,40.5 22.31,42.32 22.31,41.7 24.15,41.66 26.55,42.2 26.03,42.22 25.98,41.68 24.45,43.48 23.81,43.48 24.05,42.8 26.55,41.25 25.75,40.6 26,42.85 25.93,43.49 26.52,43.2 34.09,42.23 34.35,40.5 32.31,42.32 32.31,41.7 34.15,41.66 36.55,42.2 36.03,42.22 35.98,41.68 34.45,43.48 33.81,43.48 34.05,42.8 36.55,41.25 35.75,40.6 36,42.85 35.93,43.49 36.52,43.2 44.09,42.23 44.35,40.5 42.31,42.32 42.31,41.7 44.15,41.66 46.55,42.2 46.03,42.22 45.98,41.68 44.45,43.48 43.81,43.48 44.05,42.8 46.55,41.25 45.75,40.6 46,42.85 45.93,43.49 46.52,43.2 54.09,42.23 54.35,40.5 52.31,42.32 52.31,41.7 54.15,41.66 56.55,42.2 56.03,42.22 55.98,41.68 54.45,43.48 53.81,43.48 54.05,42.8 56.55,41.25 55.75,40.6 56,42.85 55.93,43.49 56.52,43.2 14.09,52.23 14.35,50.5 12.31,52.32 12.31,51.7 14.15,51.66 16.55,52.2 16.03,52.22 15.98,51.68 14.45,53.48 13.81,53.48 14.05,52.8 16.55,51.25 15.75,50.6 16,52.85 15.93,53.49 16.52,53.2 24.09,52.23 24.35,50.5 22.31,52.32 22.31,51.7 24.15,51.66 26.55,52.2 26.03,52.22 25.98,51.68 24.45,53.48 23.81,53.48 24.05,52.8 26.55,51.25 25.75,50.6 26,52.85 25.93,53.49 26.52,53.2 34.09,52.23 34.35,50.5 32.31,52.32 32.31,51.7 34.15,51.66 36.55,52.2 36.03,52.22 35.98,51.68 34.45,53.48 33.81,53.48 34.05,52.8 36.55,51.25 35.75,50.6 36,52.85 35.93,53.49 36.52,53.2 44.09,52.23 44.35,50.5 42.31,52.32 42.31,51.7 44.15,51.66 46.55,52.2 46.03,52.22 45.98,51.68 44.45,53.48 43.81,53.48 44.05,52.8 46.55,51.25 45.75,50.6 46,52.85 45.93,53.49 46.52,53.2 54.09,52.23 54.35,50.5 52.31,52.32 52.31,51.7 54.15,51.66 56.55,52.2 56.03,52.22 55.98,51.68 54.45,53.48 53.81,53.48 54.05,52.8 56.55,51.25 55.75,50.6 56,52.85 55.93,53.49 56.52,53.2
  pour Bottom (isolate 0.02, rank 2, no thermals): 12,13.8 16.9,13.8 16.9,10 12,10
  pour Route15 (isolate 0.02, rank 2, no thermals): 12,13.8 16.9,13.8 16.9,10 12,10
  pour Top (isolate 0.02, rank 2, no thermals): 12,13.8 16.9,13.8 16.9,10 12,10
  pour Route15 (isolate 0.02, rank 2, no thermals): 12,13.8 16.9,13.8 16.9,10 12,10
  pour Route2 (isolate 0.02, rank 2, no thermals): 12,13.8 16.9,13.8 16.9,10 12,10
  pour Bottom (isolate 0.02, rank 2, no thermals): 22,13.8 26.9,13.8 26.9,10 22,10
  pour Route15 (isolate 0.02, rank 2, no thermals): 22,13.8 26.9,13.8 26.9,10 22,10
  pour Top (isolate 0.02, rank 2, no thermals): 22,13.8 26.9,13.8 26.9,10 22,10
  pour Route15 (isolate 0.02, rank 2, no thermals): 22,13.8 26.9,13.8 26.9,10 22,10
  pour Route2 (isolate 0.02, rank 2, no thermals): 22,13.8 26.9,13.8 26.9,10 22,10
  pour Bottom (isolate 0.02, rank 2, no thermals): 32,13.8 36.9,13.8 36.9,10 32,10
  pour Route15 (isolate 0.02, rank 2, no thermals): 32,13.8 36.9,13.8 36.9,10 32,10
  pour Top (isolate 0.02, rank 2, no thermals): 32,13.8 36.9,13.8 36.9,10 32,10
  pour Route15 (isolate 0.02, rank 2, no thermals): 32,13.8 36.9,13.8 36.9,10 32,10
  pour Route2 (isolate 0.02, rank 2, no thermals): 32,13.8 36.9,13.8 36.9,10 32,10
  pour Bottom (isolate 0.02, rank 2, no thermals): 42,13.8 46.9,13.8 46.9,10 42,10
  pour Route15 (isolate 0.02, rank 2, no thermals): 42,13.8 46.9,13.8 46.9,10 42,10
  pour Top (isolate 0.02, rank 2, no thermals): 42,13.8 46.9,13.8 46.9,10 42,10
  pour Route15 (isolate 0.02, rank 2, no thermals): 42,13.8 46.9,13.8 46.9,10 42,10
  pour Route2 (isolate 0.02, rank 2, no thermals): 42,13.8 46.9,13.8 46.9,10 42,10
  pour Bottom (isolate 0.02, rank 2, no thermals): 52,13.8 56.9,13.8 56.9,10 52,10
  pour Route15 (isolate 0.02, rank 2, no thermals): 52,13.8 56.9,13.8 56.9,10 52,10
  pour Top (isolate 0.02, rank 2, no thermals): 52,13.8 56.9,13.8 56.9,10 52,10
  pour Route15 (isolate 0.02, rank 2, no thermals): 52,13.8 56.9,13.8 56.9,10 52,10
  pour Route2 (isolate 0.02, rank 2, no thermals): 52,13.8 56.9,13.8 56.9,10 52,10
  pour Bottom (isolate 0.02, rank 2, no thermals): 12,23.8 16.9,23.8 16.9,20 12,20
  pour Route15 (isolate 0.02, rank 2, no thermals): 12,23.8 16.9,23.8 16.9,20 12,20
  pour Top (isolate 0.02, rank 2, no thermals): 12,23.8 16.9,23.8 16.9,20 12,20
  pour Route15 (isolate 0.02, rank 2, no thermals): 12,23.8 16.9,23.8 16.9,20 12,20
  pour Route2 (isolate 0.02, rank 2, no thermals): 12,23.8 16.9,23.8 16.9,20 12,20
  pour Bottom (isolate 0.02, rank 2, no thermals): 22,23.8 26.9,23.8 26.9,20 22,20
  pour Route15 (isolate 0.02, rank 2, no thermals): 22,23.8 26.9,23.8 26.9,20 22,20
  pour Top (isolate 0.02, rank 2, no thermals): 22,23.8 26.9,23.8 26.9,20 22,20
  pour Route15 (isolate 0.02, rank 2, no thermals): 22,23.8 26.9,23.8 26.9,20 22,20
  pour Route2 (isolate 0.02, rank 2, no thermals): 22,23.8 26.9,23.8 26.9,20 22,20
  pour Bottom (isolate 0.02, rank 2, no thermals): 32,23.8 36.9,23.8 36.9,20 32,20
  pour Route15 (isolate 0.02, rank 2, no thermals): 32,23.8 36.9,23.8 36.9,20 32,20
  pour Top (isolate 0.02, rank 2, no thermals): 32,23.8 36.9,23.8 36.9,20 32,20
  pour Route15 (isolate 0.02, rank 2, no thermals): 32,23.8 36.9,23.8 36.9,20 32,20
  pour Route2 (isolate 0.02, rank 2, no thermals): 32,23.8 36.9,23.8 36.9,20 32,20
  pour Bottom (isolate 0.02, rank 2, no thermals): 42,23.8 46.9,23.8 46.9,20 42,20
  pour Route15 (isolate 0.02, rank 2, no thermals): 42,23.8 46.9,23.8 46.9,20 42,20
  pour Top (isolate 0.02, rank 2, no thermals): 42,23.8 46.9,23.8 46.9,20 42,20
  pour Route15 (isolate 0.02, rank 2, no thermals): 42,23.8 46.9,23.8 46.9,20 42,20
  pour Route2 (isolate 0.02, rank 2, no thermals): 42,23.8 46.9,23.8 46.9,20 42,20
  pour Bottom (isolate 0.02, rank 2, no thermals): 52,23.8 56.9,23.8 56.9,20 52,20
  pour Route15 (isolate 0.02, rank 2, no thermals): 52,23.8 56.9,23.8 56.9,20 52,20
  pour Top (isolate 0.02, rank 2, no thermals): 52,23.8 56.9,23.8 56.9,20 52,20
  pour Route15 (isolate 0.02, rank 2, no thermals): 52,23.8 56.9,23.8 56.9,20 52,20
  pour Route2 (isolate 0.02, rank 2, no thermals): 52,23.8 56.9,23.8 56.9,20 52,20
  pour Bottom (isolate 0.02, rank 2, no thermals): 12,33.8 16.9,33.8 16.9,30 12,30
  pour Route15 (isolate 0.02, rank 2, no thermals): 12,33.8 16.9,33.8 16.9,30 12,30
  pour Top (isolate 0.02, rank 2, no thermals): 12,33.8 16.9,33.8 16.9,30 12,30
  pour Route15 (isolate 0.02, rank 2, no thermals): 12,33.8 16.9,33.8 16.9,30 12,30
  pour Route2 (isolate 0.02, rank 2, no thermals): 12,33.8 16.9,33.8 16.9,30 12,30
  pour Bottom (isolate 0.02, rank 2, no thermals): 22,33.8 26.9,33.8 26.9,30 22,30
  pour Route15 (isolate 0.02, rank 2, no thermals): 22,33.8 26.9,33.8 26.9,30 22,30
  pour Top (isolate 0.02, rank 2, no thermals): 22,33.8 26.9,33.8 26.9,30 22,30
  pour Route15 (isolate 0.02, rank 2, no thermals): 22,33.8 26.9,33.8 26.9,30 22,30
  pour Route2 (isolate 0.02, rank 2, no thermals): 22,33.8 26.9,33.8 26.9,30 22,30
  pour Bottom (isolate 0.02, rank 2, no thermals): 32,33.8 36.9,33.8 36.9,30 32,30
  pour Route15 (isolate 0.02, rank 2, no thermals): 32,33.8 36.9,33.8 36.9,30 32,30
  pour Top (isolate 0.02, rank 2, no thermals): 32,33.8 36.9,33.8 36.9,30 32,30
  pour Route15 (isolate 0.02, rank 2, no thermals): 32,33.8 36.9,33.8 36.9,30 32,30
  pour Route2 (isolate 0.02, rank 2, no thermals): 32,33.8 36.9,33.8 36.9,30 32,30
  pour Bottom (isolate 0.02, rank 2, no thermals): 42,33.8 46.9,33.8 46.9,30 42,30
  pour Route15 (isolate 0.02, rank 2, no thermals): 42,33.8 46.9,33.8 46.9,30 42,30
  pour Top (isolate 0.02, rank 2, no thermals): 42,33.8 46.9,33.8 46.9,30 42,30
  pour Route15 (isolate 0.02, rank 2, no thermals): 42,33.8 46.9,33.8 46.9,30 42,30
  pour Route2 (isolate 0.02, rank 2, no thermals): 42,33.8 46.9,33.8 46.9,30 42,30
  pour Bottom (isolate 0.02, rank 2, no thermals): 52,33.8 56.9,33.8 56.9,30 52,30
  pour Route15 (isolate 0.02, rank 2, no thermals): 52,33.8 56.9,33.8 56.9,30 52,30
  pour Top (isolate 0.02, rank 2, no thermals): 52,33.8 56.9,33.8 56.9,30 52,30
  pour Route15 (isolate 0.02, rank 2, no thermals): 52,33.8 56.9,33.8 56.9,30 52,30
  pour Route2 (isolate 0.02, rank 2, no thermals): 52,33.8 56.9,33.8 56.9,30 52,30
  pour Bottom (isolate 0.02, rank 2, no thermals): 12,43.8 16.9,43.8 16.9,40 12,40
  pour Route15 (isolate 0.02, rank 2, no thermals): 12,43.8 16.9,43.8 16.9,40 12,40
  pour Top (isolate 0.02, rank 2, no thermals): 12,43.8 16.9,43.8 16.9,40 12,40
  pour Route15 (isolate 0.02, rank 2, no thermals): 12,43.8 16.9,43.8 16.9,40 12,40
  pour Route2 (isolate 0.02, rank 2, no thermals): 12,43.8 16.9,43.8 16.9,40 12,40
  pour Bottom (isolate 0.02, rank 2, no thermals): 22,43.8 26.9,43.8 26.9,40 22,40
  pour Route15 (isolate 0.02, rank 2, no thermals): 22,43.8 26.9,43.8 26.9,40 22,40
  pour Top (isolate 0.02, rank 2, no thermals): 22,43.8 26.9,43.8 26.9,40 22,40
  pour Route15 (isolate 0.02, rank 2, no thermals): 22,43.8 26.9,43.8 26.9,40 22,40
  pour Route2 (isolate 0.02, rank 2, no thermals): 22,43.8 26.9,43.8 26.9,40 22,40
  pour Bottom (isolate 0.02, rank 2, no thermals): 32,43.8 36.9,43.8 36.9,40 32,40
  pour Route15 (isolate 0.02, rank 2, no thermals): 32,43.8 36.9,43.8 36.9,40 32,40
  pour Top (isolate 0.02, rank 2, no thermals): 32,43.8 36.9,43.8 36.9,40 32,40
  pour Route15 (isolate 0.02, rank 2, no thermals): 32,43.8 36.9,43.8 36.9,40 32,40
  pour Route2 (isolate 0.02, rank 2, no thermals): 32,43.8 36.9,43.8 36.9,40 32,40
  pour Bottom (isolate 0.02, rank 2, no thermals): 42,43.8 46.9,43.8 46.9,40 42,40
  pour Route15 (isolate 0.02, rank 2, no thermals): 42,43.8 46.9,43.8 46.9,40 42,40
  pour Top (isolate 0.02, rank 2, no thermals): 42,43.8 46.9,43.8 46.9,40 42,40
  pour Route15 (isolate 0.02, rank 2, no thermals): 42,43.8 46.9,43.8 46.9,40 42,40
  pour Route2 (isolate 0.02, rank 2, no thermals): 42,43.8 46.9,43.8 46.9,40 42,40
  pour Bottom (isolate 0.02, rank 2, no thermals): 52,43.8 56.9,43.8 56.9,40 52,40
  pour Route15 (isolate 0.02, rank 2, no thermals): 52,43.8 56.9,43.8 56.9,40 52,40
  pour Top (isolate 0.02, rank 2, no thermals): 52,43.8 56.9,43.8 56.9,40 52,40
  pour Route15 (isolate 0.02, rank 2, no thermals): 52,43.8 56.9,43.8 56.9,40 52,40
  pour Route2 (isolate 0.02, rank 2, no thermals): 52,43.8 56.9,43.8 56.9,40 52,40
  pour Bottom (isolate 0.02, rank 2, no thermals): 12,53.8 16.9,53.8 16.9,50 12,50
  pour Route15 (isolate 0.02, rank 2, no thermals): 12,53.8 16.9,53.8 16.9,50 12,50
  pour Top (isolate 0.02, rank 2, no thermals): 12,53.8 16.9,53.8 16.9,50 12,50
  pour Route15 (isolate 0.02, rank 2, no thermals): 12,53.8 16.9,53.8 16.9,50 12,50
  pour Route2 (isolate 0.02, rank 2, no thermals): 12,53.8 16.9,53.8 16.9,50 12,50
  pour Bottom (isolate 0.02, rank 2, no thermals): 22,53.8 26.9,53.8 26.9,50 22,50
  pour Route15 (isolate 0.02, rank 2, no thermals): 22,53.8 26.9,53.8 26.9,50 22,50
  pour Top (isolate 0.02, rank 2, no thermals): 22,53.8 26.9,53.8 26.9,50 22,50
  pour Route15 (isolate 0.02, rank 2, no thermals): 22,53.8 26.9,53.8 26.9,50 22,50
  pour Route2 (isolate 0.02, rank 2, no thermals): 22,53.8 26.9,53.8 26.9,50 22,50
  pour Bottom (isolate 0.02, rank 2, no thermals): 32,53.8 36.9,53.8 36.9,50 32,50
  pour Route15 (isolate 0.02, rank 2, no thermals): 32,53.8 36.9,53.8 36.9,50 32,50
  pour Top (isolate 0.02, rank 2, no thermals): 32,53.8 36.9,53.8 36.9,50 32,50
  pour Route15 (isolate 0.02, rank 2, no thermals): 32,53.8 36.9,53.8 36.9,50 32,50
  pour Route2 (isolate 0.02, rank 2, no thermals): 32,53.8 36.9,53.8 36.9,50 32,50
  pour Bottom (isolate 0.02, rank 2, no thermals): 42,53.8 46.9,53.8 46.9,50 42,50
  pour Route15 (isolate 0.02, rank 2, no thermals): 42,53.8 46.9,53.8 46.9,50 42,50
  pour Top (isolate 0.02, rank 2, no thermals): 42,53.8 46.9,53.8 46.9,50 42,50
  pour Route15 (isolate 0.02, rank 2, no thermals): 42,53.8 46.9,53.8 46.9,50 42,50
  pour Route2 (isolate 0.02, rank 2, no thermals): 42,53.8 46.9,53.8 46.9,50 42,50
  pour Bottom (isolate 0.02, rank 2, no thermals): 52,53.8 56.9,53.8 56.9,50 52,50
  pour Route15 (isolate 0.02, rank 2, no thermals): 52,53.8 56.9,53.8 56.9,50 52,50
  pour Top (isolate 0.02, rank 2, no thermals): 52,53.8 56.9,53.8 56.9,50 52,50
  pour Route15 (isolate 0.02, rank 2, no thermals): 52,53.8 56.9,53.8 56.9,50 52,50
  pour Route2 (isolate 0.02, rank 2, no thermals): 52,53.8 56.9,53.8 56.9,50 52,50
N$3  (via drill 0.4)
  Top 0.2: L3.2 22.55,12.99 v22.7,12.95
  Bottom 0.4: J6.1 22.55,10.71 R2.2 arc90 22.7,11.01 22.7,11.38 22.81,11.49 22.81,12.53 22.7,12.64 v22.7,12.95
N$4
  cutout Top: 24.45,10.55 22.1,10.55 22.1,11.4 24.35,11.4 24.45,11.2
N$5  (via drill 0.4)
  Top 0.2: L4.2 12.55,22.99 v12.7,22.95
  Bottom 0.4: J8.1 12.55,20.71 R4.2 arc90 12.7,21.01 12.7,21.38 12.81,21.49 12.81,22.53 12.7,22.64 v12.7,22.95
N$6
  cutout Top: 14.45,20.55 12.1,20.55 12.1,21.4 14.35,21.4 14.45,21.2
N$7  (via drill 0.4)
  Top 0.2: L5.2 32.55,12.99 v32.7,12.95
  Bottom 0.4: J10.1 32.55,10.71 R5.2 arc90 32.7,11.01 32.7,11.38 32.81,11.49 32.81,12.53 32.7,12.64 v32.7,12.95
N$8
  cutout Top: 34.45,10.55 32.1,10.55 32.1,11.4 34.35,11.4 34.45,11.2
N$9  (via drill 0.4)
  Top 0.2: L6.2 32.55,22.99 v32.7,22.95
  Bottom 0.4: J12.1 32.55,20.71 R6.2 arc90 32.7,21.01 32.7,21.38 32.81,21.49 32.81,22.53 32.7,22.64 v32.7,22.95
N$10
  cutout Top: 34.45,20.55 32.1,20.55 32.1,21.4 34.35,21.4 34.45,21.2
N$11  (via drill 0.4)
  Top 0.2: L7.2 42.55,12.99 v42.7,12.95
  Bottom 0.4: J14.1 42.55,10.71 R7.2 arc90 42.7,11.01 42.7,11.38 42.81,11.49 42.81,12.53 42.7,12.64 v42.7,12.95
N$12
  cutout Top: 44.45,10.55 42.1,10.55 42.1,11.4 44.35,11.4 44.45,11.2
N$13  (via drill 0.4)
  Top 0.2: L8.2 22.55,22.99 v22.7,22.95
  Bottom 0.4: J16.1 22.55,20.71 R8.2 arc90 22.7,21.01 22.7,21.38 22.81,21.49 22.81,22.53 22.7,22.64 v22.7,22.95
N$14
  cutout Top: 24.45,20.55 22.1,20.55 22.1,21.4 24.35,21.4 24.45,21.2
N$15  (via drill 0.4)
  Top 0.2: L9.2 52.55,12.99 v52.7,12.95
  Bottom 0.4: J18.1 52.55,10.71 R9.2 arc90 52.7,11.01 52.7,11.38 52.81,11.49 52.81,12.53 52.7,12.64 v52.7,12.95
N$16
  cutout Top: 54.45,10.55 52.1,10.55 52.1,11.4 54.35,11.4 54.45,11.2
N$19  (via drill 0.4)
  Top 0.2: L11.2 42.55,22.99 v42.7,22.95
  Bottom 0.4: J22.1 42.55,20.71 R11.2 arc90 42.7,21.01 42.7,21.38 42.81,21.49 42.81,22.53 42.7,22.64 v42.7,22.95
N$20
  cutout Top: 44.45,20.55 42.1,20.55 42.1,21.4 44.35,21.4 44.45,21.2
N$23  (via drill 0.4)
  Top 0.2: L13.2 52.55,22.99 v52.7,22.95
  Bottom 0.4: J26.1 52.55,20.71 R13.2 arc90 52.7,21.01 52.7,21.38 52.81,21.49 52.81,22.53 52.7,22.64 v52.7,22.95
N$24
  cutout Top: 54.45,20.55 52.1,20.55 52.1,21.4 54.35,21.4 54.45,21.2
N$27  (via drill 0.4)
  Top 0.2: L15.2 12.55,32.99 v12.7,32.95
  Bottom 0.4: J30.1 12.55,30.71 R15.2 arc90 12.7,31.01 12.7,31.38 12.81,31.49 12.81,32.53 12.7,32.64 v12.7,32.95
N$28
  cutout Top: 14.45,30.55 12.1,30.55 12.1,31.4 14.35,31.4 14.45,31.2
N$31  (via drill 0.4)
  Top 0.2: L17.2 22.55,32.99 v22.7,32.95
  Bottom 0.4: J34.1 22.55,30.71 R17.2 arc90 22.7,31.01 22.7,31.38 22.81,31.49 22.81,32.53 22.7,32.64 v22.7,32.95
N$32
  cutout Top: 24.45,30.55 22.1,30.55 22.1,31.4 24.35,31.4 24.45,31.2
N$35  (via drill 0.4)
  Top 0.2: L19.2 32.55,32.99 v32.7,32.95
  Bottom 0.4: J38.1 32.55,30.71 R19.2 arc90 32.7,31.01 32.7,31.38 32.81,31.49 32.81,32.53 32.7,32.64 v32.7,32.95
N$36
  cutout Top: 34.45,30.55 32.1,30.55 32.1,31.4 34.35,31.4 34.45,31.2
N$39  (via drill 0.4)
  Top 0.2: L21.2 42.55,32.99 v42.7,32.95
  Bottom 0.4: J42.1 42.55,30.71 R21.2 arc90 42.7,31.01 42.7,31.38 42.81,31.49 42.81,32.53 42.7,32.64 v42.7,32.95
N$40
  cutout Top: 44.45,30.55 42.1,30.55 42.1,31.4 44.35,31.4 44.45,31.2
N$43  (via drill 0.4)
  Top 0.2: L23.2 52.55,32.99 v52.7,32.95
  Bottom 0.4: J46.1 52.55,30.71 R23.2 arc90 52.7,31.01 52.7,31.38 52.81,31.49 52.81,32.53 52.7,32.64 v52.7,32.95
N$44
  cutout Top: 54.45,30.55 52.1,30.55 52.1,31.4 54.35,31.4 54.45,31.2
N$47  (via drill 0.4)
  Top 0.2: L25.2 12.55,42.99 v12.7,42.95
  Bottom 0.4: J50.1 12.55,40.71 R25.2 arc90 12.7,41.01 12.7,41.38 12.81,41.49 12.81,42.53 12.7,42.64 v12.7,42.95
N$48  (via drill 0.4)
  Top 0.2: L1.2 12.55,12.99 v12.7,12.95
  Bottom 0.4: J2.1 12.55,10.71 R3.2 arc90 12.7,11.01 12.7,11.38 12.81,11.49 12.81,12.53 12.7,12.64 v12.7,12.95
N$49
  cutout Top: 14.45,10.55 12.1,10.55 12.1,11.4 14.35,11.4 14.45,11.2
N$50
  cutout Top: 14.45,40.55 12.1,40.55 12.1,41.4 14.35,41.4 14.45,41.2
N$53  (via drill 0.4)
  Top 0.2: L27.2 22.55,42.99 v22.7,42.95
  Bottom 0.4: J54.1 22.55,40.71 R27.2 arc90 22.7,41.01 22.7,41.38 22.81,41.49 22.81,42.53 22.7,42.64 v22.7,42.95
N$54
  cutout Top: 24.45,40.55 22.1,40.55 22.1,41.4 24.35,41.4 24.45,41.2
N$57  (via drill 0.4)
  Top 0.2: L29.2 32.55,42.99 v32.7,42.95
  Bottom 0.4: J58.1 32.55,40.71 R29.2 arc90 32.7,41.01 32.7,41.38 32.81,41.49 32.81,42.53 32.7,42.64 v32.7,42.95
N$58
  cutout Top: 34.45,40.55 32.1,40.55 32.1,41.4 34.35,41.4 34.45,41.2
N$61  (via drill 0.4)
  Top 0.2: L31.2 42.55,42.99 v42.7,42.95
  Bottom 0.4: J62.1 42.55,40.71 R31.2 arc90 42.7,41.01 42.7,41.38 42.81,41.49 42.81,42.53 42.7,42.64 v42.7,42.95
N$62
  cutout Top: 44.45,40.55 42.1,40.55 42.1,41.4 44.35,41.4 44.45,41.2
N$65  (via drill 0.4)
  Top 0.2: L33.2 52.55,42.99 v52.7,42.95
  Bottom 0.4: J66.1 52.55,40.71 R33.2 arc90 52.7,41.01 52.7,41.38 52.81,41.49 52.81,42.53 52.7,42.64 v52.7,42.95
N$66
  cutout Top: 54.45,40.55 52.1,40.55 52.1,41.4 54.35,41.4 54.45,41.2
N$69  (via drill 0.4)
  Top 0.2: L35.2 12.55,52.99 v12.7,52.95
  Bottom 0.4: J70.1 12.55,50.71 R35.2 arc90 12.7,51.01 12.7,51.38 12.81,51.49 12.81,52.53 12.7,52.64 v12.7,52.95
N$70
  cutout Top: 14.45,50.55 12.1,50.55 12.1,51.4 14.35,51.4 14.45,51.2
N$73  (via drill 0.4)
  Top 0.2: L37.2 22.55,52.99 v22.7,52.95
  Bottom 0.4: J74.1 22.55,50.71 R37.2 arc90 22.7,51.01 22.7,51.38 22.81,51.49 22.81,52.53 22.7,52.64 v22.7,52.95
N$74
  cutout Top: 24.45,50.55 22.1,50.55 22.1,51.4 24.35,51.4 24.45,51.2
N$77  (via drill 0.4)
  Top 0.2: L39.2 32.55,52.99 v32.7,52.95
  Bottom 0.4: J78.1 32.55,50.71 R39.2 arc90 32.7,51.01 32.7,51.38 32.81,51.49 32.81,52.53 32.7,52.64 v32.7,52.95
N$78
  cutout Top: 34.45,50.55 32.1,50.55 32.1,51.4 34.35,51.4 34.45,51.2
N$81  (via drill 0.4)
  Top 0.2: L41.2 42.55,52.99 v42.7,52.95
  Bottom 0.4: J82.1 42.55,50.71 R41.2 arc90 42.7,51.01 42.7,51.38 42.81,51.49 42.81,52.53 42.7,52.64 v42.7,52.95
N$82
  cutout Top: 44.45,50.55 42.1,50.55 42.1,51.4 44.35,51.4 44.45,51.2
N$85  (via drill 0.4)
  Top 0.2: L43.2 52.55,52.99 v52.7,52.95
  Bottom 0.4: J86.1 52.55,50.71 R43.2 arc90 52.7,51.01 52.7,51.38 52.81,51.49 52.81,52.53 52.7,52.64 v52.7,52.95
N$86
  cutout Top: 54.45,50.55 52.1,50.55 52.1,51.4 54.35,51.4 54.45,51.2

## Text on the board
tPlace: Headstage-64 / Coax Adapter / Rev. 1.0 | CERN OHL v1.2 / JPN, MWL@MIT / 2019 | (61, 49) | (65, 13) | (6, 11)
bPlace: HS-64 / JPN / JV | HS-64 / JPN / JV | HS-64 / JPN / JV | HS-64 / JPN / JV | HS-64 / JPN / JV | HS-64 / JPN / JV | HS-64 / JPN / JV | HS-64 / JPN / JV | HS-64 / JPN / JV | HS-64 / JPN / JV | HS-64 / JPN / JV | HS-64 / JPN / JV | HS-64 / JPN / JV | HS-64 / JPN / JV | HS-64 / JPN / JV | HS-64 / JPN / JV | HS-64 / JPN / JV | HS-64 / JPN / JV | HS-64 / JPN / JV | HS-64 / JPN / JV | HS-64 / JPN / JV | HS-64 / JPN / JV | HS-64 / JPN / JV | HS-64 / JPN / JV | HS-64 / JPN / JV